# Altium PCB LED Driver and Switch Breakout.PcbDoc
Units mil, origin at the board's own origin, x right, y up, seen from the top; angles counter-clockwise.
Board outline 3815 x 5480 mil, 2 copper layers (Top Layer, Bottom Layer); 115 components, 114 nets, 550 pads, 22 vias.
Unrouted connection lines stored in the file: 68.
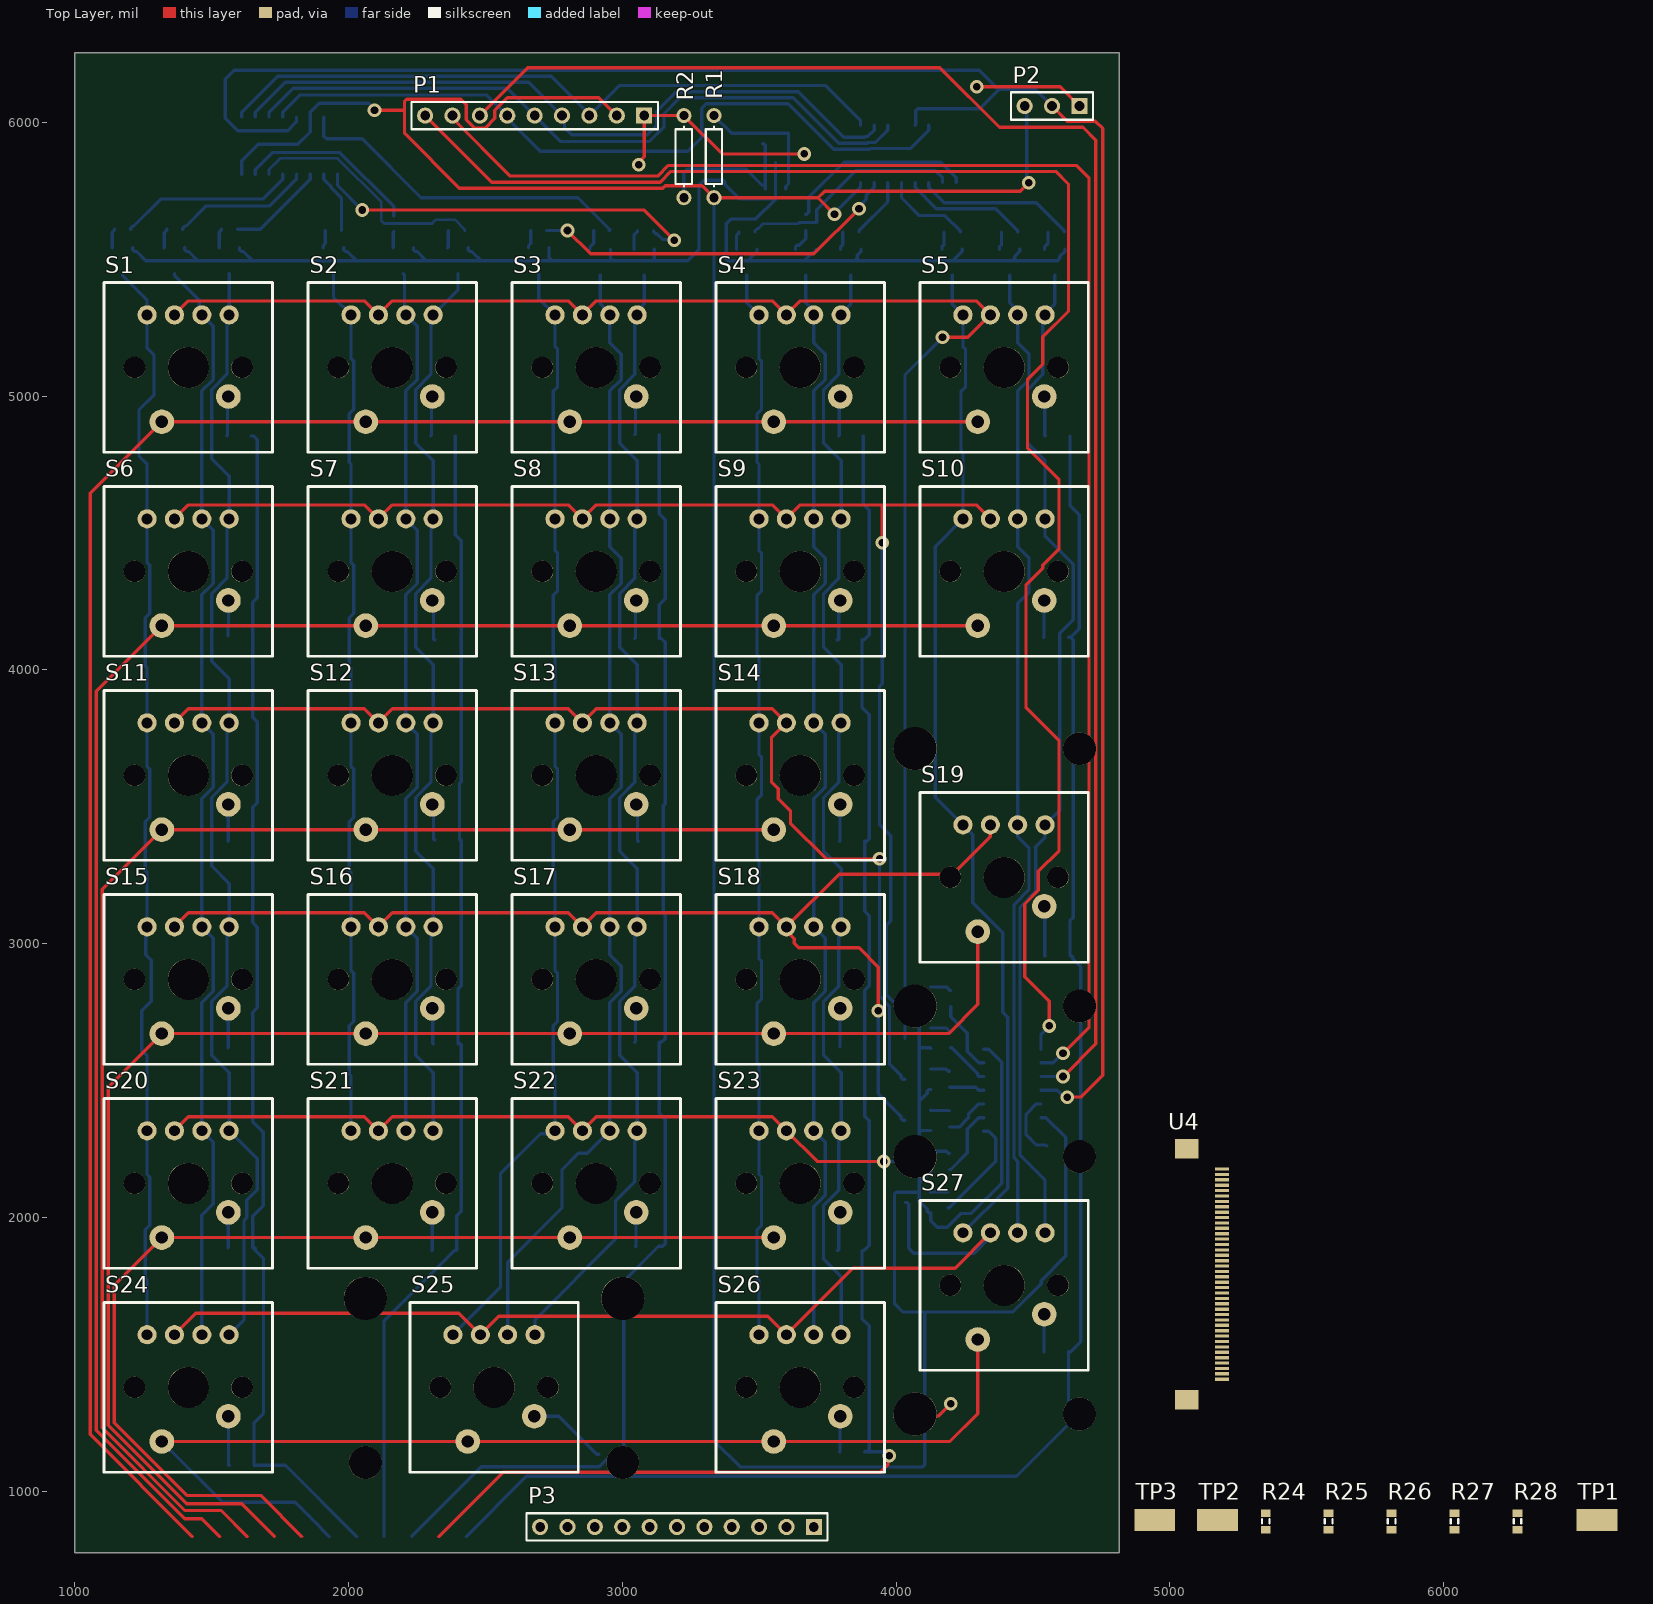
[diagram p0: Top Layer view]
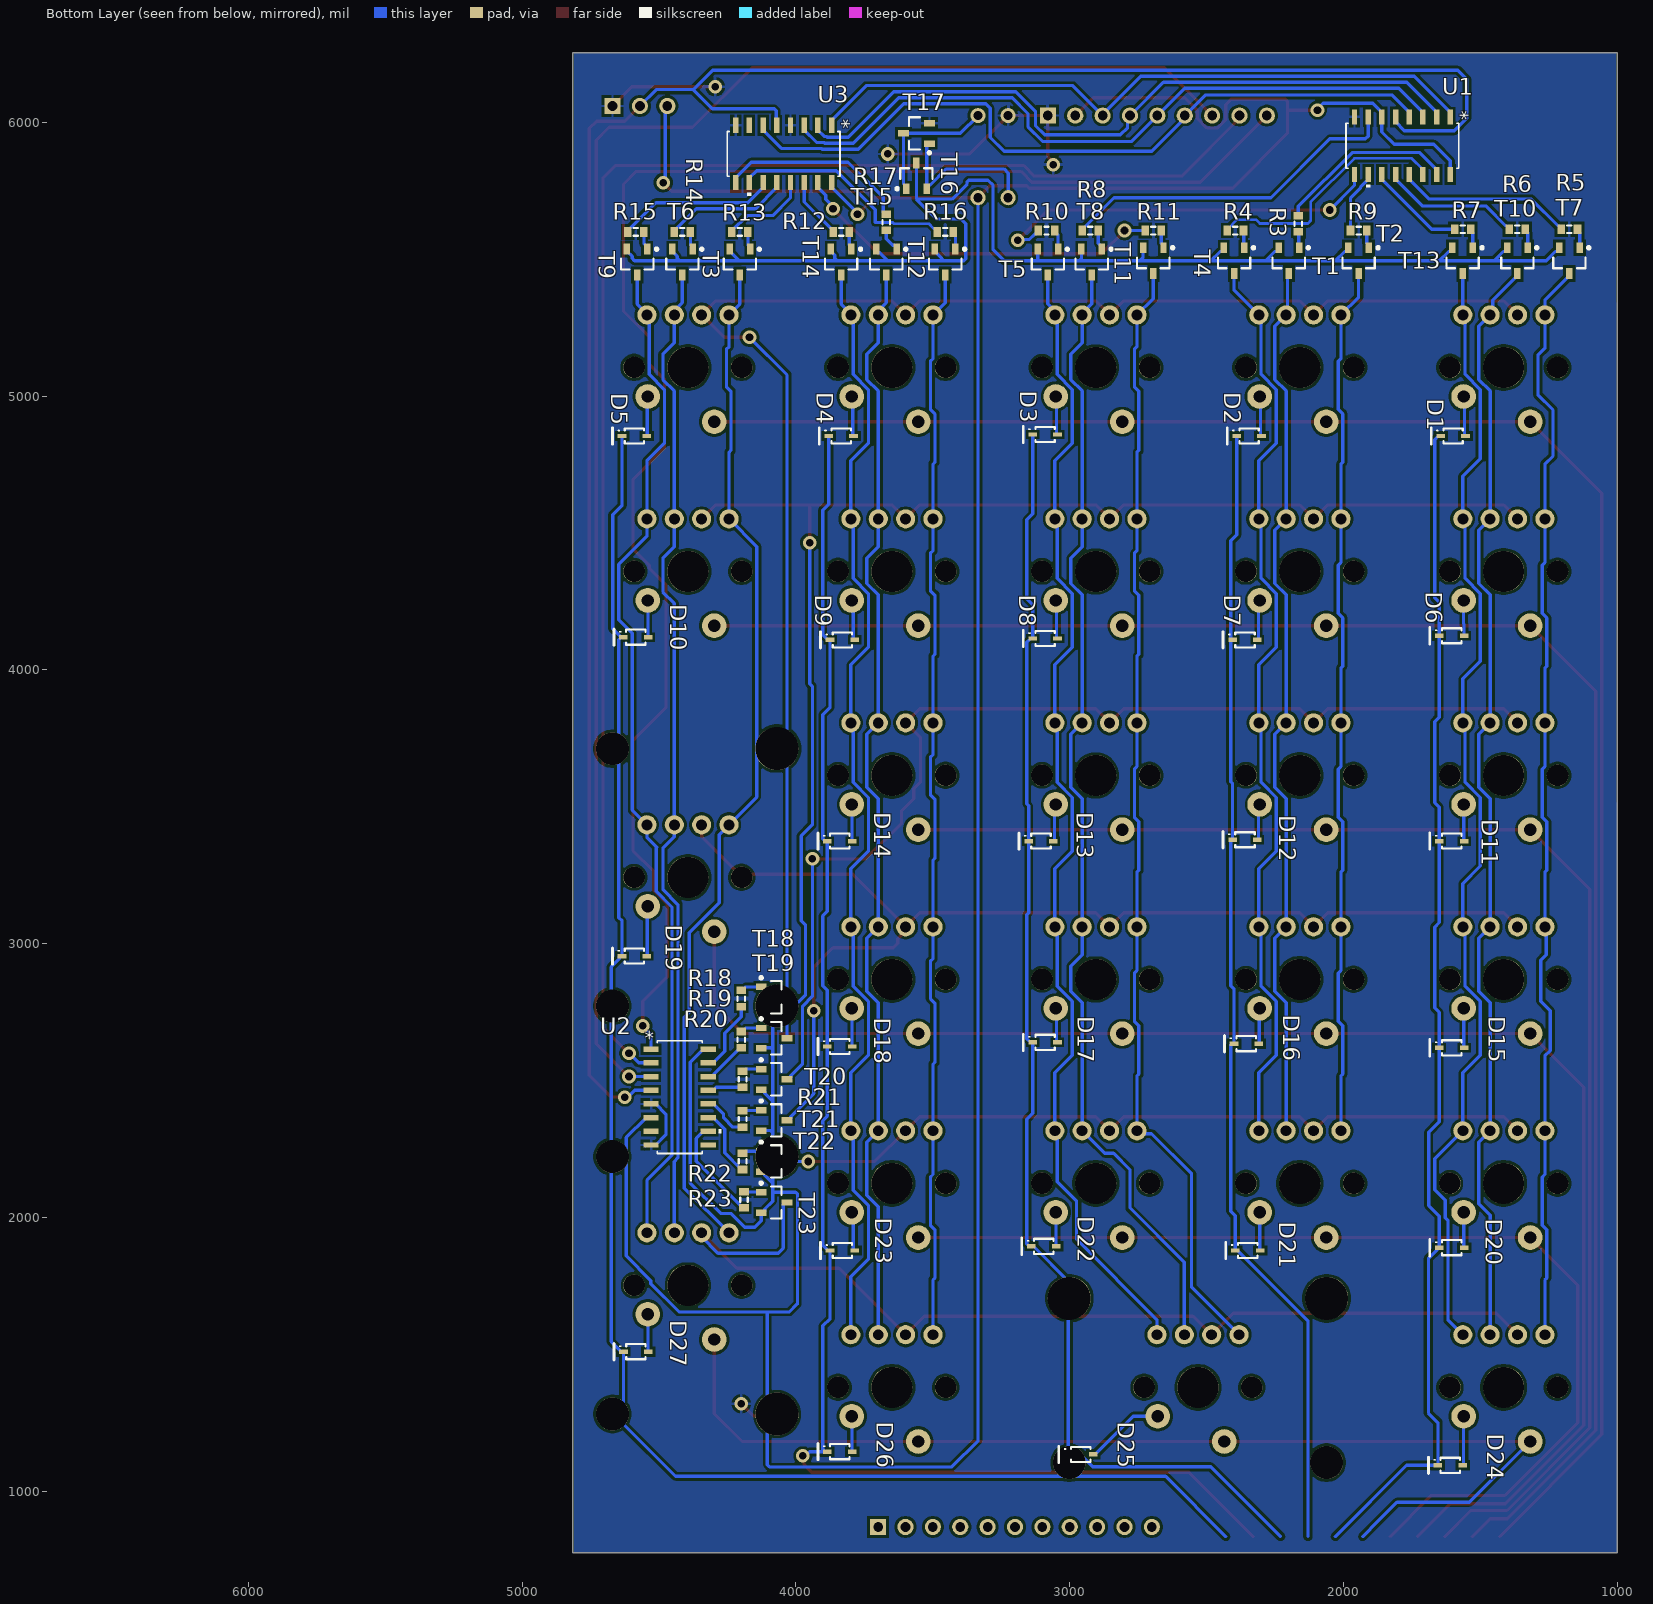
[diagram p1: Bottom Layer view, seen from below]
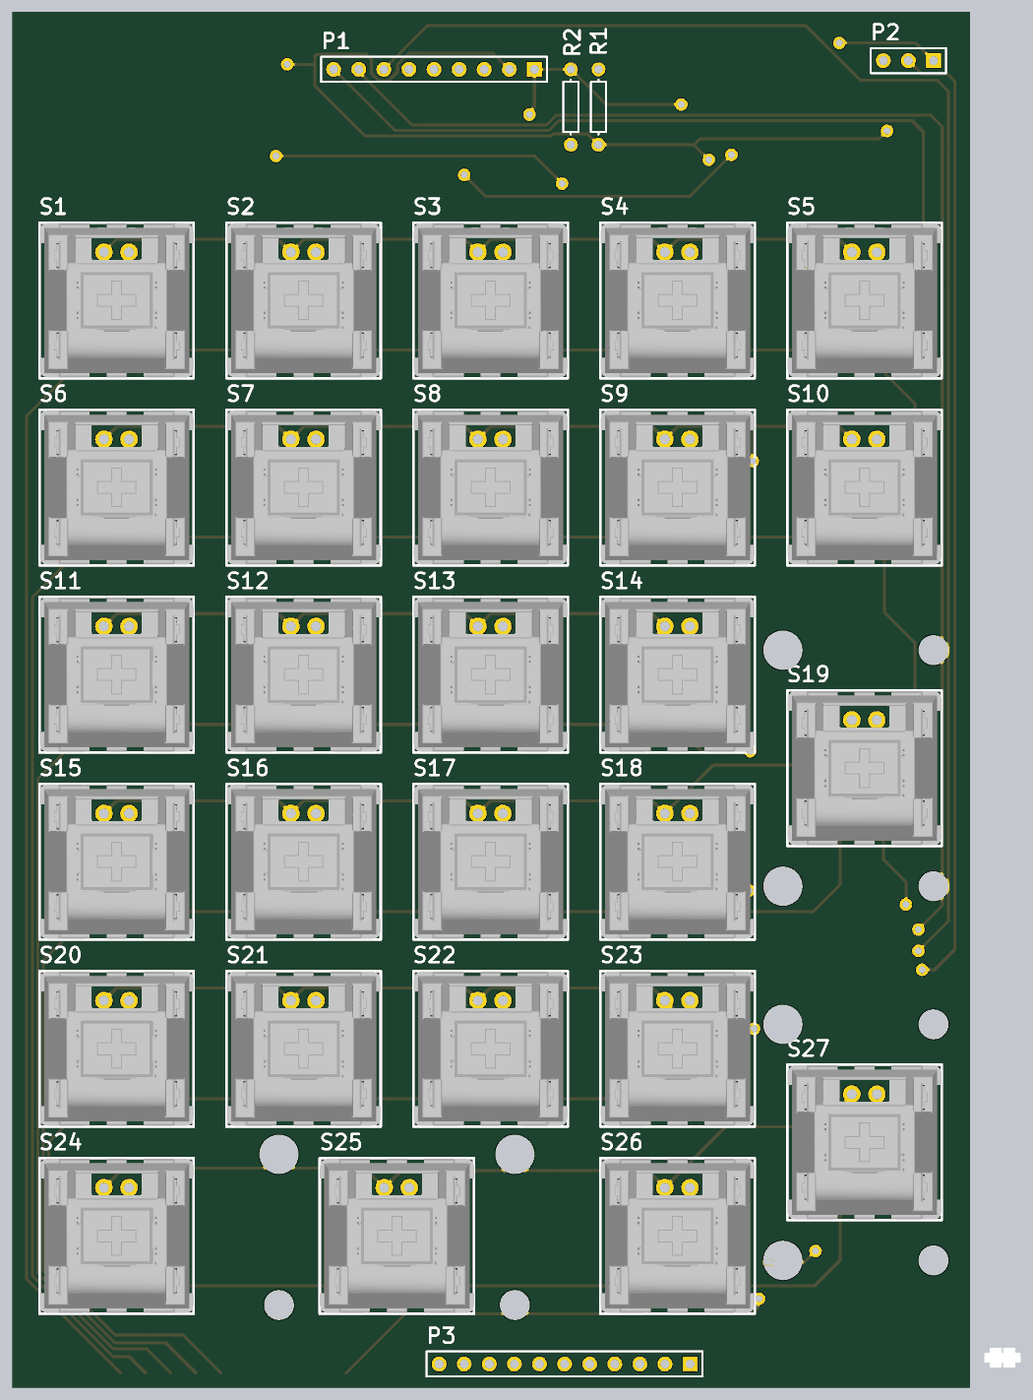
[diagram p2: 3D render of the assembled board from above, using the file's embedded part models]

## Layer stack, top to bottom
Top Solder: solder mask 0.4, Solder Resist, Dk 3.5
Top Layer: signal copper 1.4
Dielectric 1: dielectric 12.6, FR-4, Dk 4.8
Bottom Layer: signal copper 1.4
Bottom Solder: solder mask 0.4, Solder Resist, Dk 3.5

## Board outline
1000,775 4815,775 4815,6255 1000,6255

## Design rules (kind name [scope] priority, off if disabled: settings)
Clearance [All] p1: gap=10 ignorepadtopadclearanceinfootprint=FALSE except(0: Arc-Hole Track-Hole SMDPad-Hole THPad-Hole Via-Hole Fill-Hole Poly-Hole Region-Hole Text-Hole)
PolygonConnect [All] p1: connectstyle=Relief reliefconductorwidth=10 reliefentries=4 polygonreliefangle="90 Angle" airgapwidth=10
RoutingVias [All] p1: holewidth=28 width=50 viastyle="Through Hole" minholewidth=28 minwidth=50 maxholewidth=28 maxwidth=50
SolderMaskExpansion [All] p1: expansion=4 istentingtop=FALSE
Width [All] p1: maxlimit=30 minlimit=6 preferedwidth=12 bottomlayer_minwidth=10 minimp=50.000000 maximp=50.000000 favimp=50.000000
30 further rules are at their usual default settings.

## Classes and differential pairs
net class ALS[3..0]: ALS0 ALS1 ALS2 ALS3
net class AHS[2..0]: AHS0 AHS1 AHS2
net class SWL[4..0]: SWL0 SWL1 SWL2 SWL3 SWL4
net class SWH[5..0]: SWH0 SWH1 SWH2 SWH3 SWH4 SWH5
net class LS[14..0]: LS0 LS1 LS2 LS3 LS4 LS5 LS6 LS7 LS8 LS9 LS10 LS11 LS12 LS13 LS14
net class "LED Ca[14..0]": "LED Ca0" "LED Ca1" "LED Ca2" "LED Ca3" "LED Ca4" "LED Ca5" "LED Ca6" "LED Ca7" "LED Ca8" "LED Ca9" "LED Ca10" "LED Ca11" "LED Ca12" "LED Ca13" "LED Ca14"
net class "LED An[5..0]": "LED An0" "LED An1" "LED An2" "LED An3" "LED An4" "LED An5"
net class HS[5..0]: HS0 HS1 HS2 HS3 HS4 HS5
component class "LED Driver and Switch Breakout": P1 P2 P3 U4

## Components (designator, comment, footprint, x,y, rotation, side; value= is the part's Value field where it differs from the comment)
D1 "C2128 Diode" "C2128 SOD323" 1600,4855 r180 bottom
D2 "C2128 Diode" "C2128 SOD323" 2345,4855 r180 bottom
D3 "C2128 Diode" "C2128 SOD323" 3090,4860 r180 bottom
D4 "C2128 Diode" "C2128 SOD323" 3835,4855 r180 bottom
D5 "C2128 Diode" "C2128 SOD323" 4590,4855 r180 bottom
D6 "C2128 Diode" "C2128 SOD323" 1605,4125 r180 bottom
D7 "C2128 Diode" "C2128 SOD323" 2360,4110 r180 bottom
D8 "C2128 Diode" "C2128 SOD323" 3090,4115 r180 bottom
D9 "C2128 Diode" "C2128 SOD323" 3830.28,4110 r180 bottom
D10 "C2128 Diode" "C2128 SOD323" 4585,4120 r180 bottom
D11 "C2128 Diode" "C2128 SOD323" 1605,3375 r180 bottom
D12 "C2128 Diode" "C2128 SOD323" 2360,3380 r180 bottom
D13 "C2128 Diode" "C2128 SOD323" 3105,3375 r180 bottom
D14 "C2128 Diode" "C2128 SOD323" 3840,3375 r180 bottom
D15 "C2128 Diode" "C2128 SOD323" 1605,2620 r180 bottom
D16 "C2128 Diode" "C2128 SOD323" 2355,2635 r180 bottom
D17 "C2128 Diode" "C2128 SOD323" 3090.28,2640 r180 bottom
D18 "C2128 Diode" "C2128 SOD323" 3840,2625 r180 bottom
D19 "C2128 Diode" "C2128 SOD323" 4590,2955 r180 bottom
D20 "C2128 Diode" "C2128 SOD323" 1605,1890 r180 bottom
D21 "C2128 Diode" "C2128 SOD323" 2350,1880 r180 bottom
D22 "C2128 Diode" "C2128 SOD323" 3095,1895 r180 bottom
D23 "C2128 Diode" "C2128 SOD323" 3830.28,1880 r180 bottom
D24 "C2128 Diode" "C2128 SOD323" 1610,1095 r180 bottom
D25 "C2128 Diode" "C2128 SOD323" 2960,1135 r180 bottom
D26 "C2128 Diode" "C2128 SOD323" 3840,1145 r180 bottom
D27 "C2128 Diode" "C2128 SOD323" 4584.72,1510 r180 bottom
P1 "Header 9" HDR1X9 3080,6025 r180 top
P2 "Header 3" HDR1X3 4670,6060 r180 top
P3 "Header 11" HDR1X11 3700,870 r180 top
R1 "Res1" AXIAL-0.3 3335,5875 r270 top value=1K
R2 "Res1" AXIAL-0.3 3225,5875 r270 top value=1K
R3 "Res3" J1-0603 2165,5630 r270 bottom value=1K
R4 "Res3" J1-0603 2395,5605 r180 bottom value=1K
R5 "Res3" J1-0603 1175,5610 r180 bottom value=1K
R6 "Res3" J1-0603 1365.47,5610 r180 bottom value=1K
R7 "Res3" J1-0603 1565,5610 r180 bottom value=1K
R8 "Res3" J1-0603 2925,5605 r0 bottom value=1K
R9 "Res3" J1-0603 1945,5605 r180 bottom value=1K
R10 "Res3" J1-0603 3085,5605 r180 bottom value=1K
R11 "Res3" J1-0603 2695,5605 r180 bottom value=1K
R12 "Res3" J1-0603 3835,5600 r180 bottom value=1K
R13 "Res3" J1-0603 4205,5600 r180 bottom value=1K
R14 "Res3" J1-0603 4415,5600 r180 bottom value=1K
R15 "Res3" J1-0603 4585,5600 r180 bottom value=1K
R16 "Res3" J1-0603 3455,5600 r180 bottom value=1K
R17 "Res3" J1-0603 3670,5635 r270 bottom value=1K
R18 "Res3" J1-0603 4200,2800 r90 bottom value=1K
R19 "Res3" J1-0603 4200,2650 r90 bottom value=1K
R20 "Res3" J1-0603 4195,2505 r90 bottom value=1K
R21 "Res3" J1-0603 4195,2360 r90 bottom value=1K
R22 "Res3" J1-0603 4195,2205 r90 bottom value=1K
R23 "Res3" J1-0603 4190,2065 r90 bottom value=1K
R24 "Res3" J1-0603 5350,890 r90 top value=1K
R25 "Res3" J1-0603 5580,890 r90 top value=1K
R26 "Res3" J1-0603 5810,890 r90 top value=1K
R27 "Res3" J1-0603 6040,890 r90 top value=1K
R28 "Res3" J1-0603 6270,890 r90 top value=1K
S1 "Gateron w/ RGB LED" "GATERON GREEN" 1415,5105 r0 top
S2 "Gateron w/ RGB LED" "GATERON GREEN" 2160,5105 r0 top
S3 "Gateron w/ RGB LED" "GATERON GREEN" 2905,5105 r0 top
S4 "Gateron w/ RGB LED" "GATERON GREEN" 3650,5105 r0 top
S5 "Gateron w/ RGB LED" "GATERON GREEN" 4395,5105 r0 top
S6 "Gateron w/ RGB LED" "GATERON GREEN" 1415,4360 r0 top
S7 "Gateron w/ RGB LED" "GATERON GREEN" 2160,4360 r0 top
S8 "Gateron w/ RGB LED" "GATERON GREEN" 2905,4360 r0 top
S9 "Gateron w/ RGB LED" "GATERON GREEN" 3650,4360 r0 top
S10 "Gateron w/ RGB LED" "GATERON GREEN" 4395,4360 r0 top
S11 "Gateron w/ RGB LED" "GATERON GREEN" 1415,3615 r0 top
S12 "Gateron w/ RGB LED" "GATERON GREEN" 2160,3615 r0 top
S13 "Gateron w/ RGB LED" "GATERON GREEN" 2905,3615 r0 top
S14 "Gateron w/ RGB LED" "GATERON GREEN" 3650,3615 r0 top
S15 "Gateron w/ RGB LED" "GATERON GREEN" 1415,2870 r0 top
S16 "Gateron w/ RGB LED" "GATERON GREEN" 2160,2870 r0 top
S17 "Gateron w/ RGB LED" "GATERON GREEN" 2905,2870 r0 top
S18 "Gateron w/ RGB LED" "GATERON GREEN" 3650,2870 r0 top
S19 "Gateron w/ RGB LED" "GATERON GREEN W/ STABILIZER VERTICAL" 4395,3242.5 r0 top
S20 "Gateron w/ RGB LED" "GATERON GREEN" 1415,2125 r0 top
S21 "Gateron w/ RGB LED" "GATERON GREEN" 2160,2125 r0 top
S22 "Gateron w/ RGB LED" "GATERON GREEN" 2905,2125 r0 top
S23 "Gateron w/ RGB LED" "GATERON GREEN" 3650,2125 r0 top
S24 "Gateron w/ RGB LED" "GATERON GREEN" 1415,1380 r0 top
S25 "Gateron w/ RGB LED" "GATERON GREEN W/ STABILIZER HORIZONTAL" 2532,1380 r0 top
S26 "Gateron w/ RGB LED" "GATERON GREEN" 3650,1380 r0 top
S27 "Gateron w/ RGB LED" "GATERON GREEN W/ STABILIZER VERTICAL" 4395,1752.5 r0 top
T1 "C344010 NCH MOS" "C6749 NPN BJT" 2200,5495 r270 bottom
T2 "C344010 NCH MOS" "C6749 NPN BJT" 1945,5495 r270 bottom
T3 "C344010 NCH MOS" "C6749 NPN BJT" 4205,5490 r270 bottom
T4 "C344010 NCH MOS" "C6749 NPN BJT" 2400,5495 r270 bottom
T5 "C344010 NCH MOS" "C6749 NPN BJT" 3080,5490 r270 bottom
T6 "C344010 NCH MOS" "C6749 NPN BJT" 4415,5490 r270 bottom
T7 "C344010 NCH MOS" "C6749 NPN BJT" 1175,5495 r270 bottom
T8 "C344010 NCH MOS" "C6749 NPN BJT" 2920,5490 r270 bottom
T9 "C344010 NCH MOS" "C6749 NPN BJT" 4580,5490 r270 bottom
T10 "C344010 NCH MOS" "C6749 NPN BJT" 1365,5495 r270 bottom
T11 "C344010 NCH MOS" "C6749 NPN BJT" 2695,5495 r270 bottom
T12 "C344010 NCH MOS" "C6749 NPN BJT" 3455,5490 r270 bottom
T13 "C344010 NCH MOS" "C6749 NPN BJT" 1565,5495 r270 bottom
T14 "C344010 NCH MOS" "C6749 NPN BJT" 3835,5490 r270 bottom
T15 "C344010 NCH MOS" "C6749 NPN BJT" 3670,5490 r270 bottom
T16 "C6749 NPN BJT" "C6749 NPN BJT" 3560,5805 r90 bottom
T17 "C6749 NPN BJT" "C6749 NPN BJT" 3560,5960 r0 bottom
T18 "C15127 PCH MOS" "C6749 NPN BJT" 4080,2805 r180 bottom
T19 "C15127 PCH MOS" "C6749 NPN BJT" 4080,2655 r180 bottom
T20 "C15127 PCH MOS" "C6749 NPN BJT" 4080,2505 r180 bottom
T21 "C15127 PCH MOS" "C6749 NPN BJT" 4080,2355 r180 bottom
T22 "C15127 PCH MOS" "C6749 NPN BJT" 4080,2205 r180 bottom
T23 "C15127 PCH MOS" "C6749 NPN BJT" 4080,2055 r180 bottom
TP1 "5019" KSTN-5019_V 6560,895 r0 top
TP2 "5019" KSTN-5019_V 5175,895 r0 top
TP3 "5019" KSTN-5019_V 4945,895 r0 top
U1 "74HC238" SOIC16 1785,5915 r270 bottom
U2 "74HC138" SOIC16 4425,2440 r180 bottom
U3 "74HC238" SOIC16 4045,5885 r270 bottom
U4 "FFC 40pos Connector" F305-1A7H1-11040-E100 5190,1409.45 r90 top

## Footprints (in the part's own frame and the unit in brackets; to place one, negate y for a bottom-side part, rotate by r counter-clockwise, add the part's x,y. Pads: shape width x height; smd on the part's side, far side on the other; paste and mask are expansions set on the pad)
AXIAL-0.3 [mm] "Axial Device, Thru-Hole; 2 Leads; 0.3 in Pin Spacing"
  round 1.4 hole 0.85: 1(-3.81,0) 2(3.81,0)
  silkscreen extent -2.77,-0.76 2.77,0.76
"C2128 SOD323" [mm] "SODFL, 2-Leads, Body 1.30x2.50mm, IPC Medium Density"
  rect 0.8x0.4 smd: 1(1.15,0) 2(-1.15,0)
  silkscreen extent -2.03,-0.76 0.9,0.76, body extent -0.9,-0.7 0.9,0.7, height 1.1
"C6749 NPN BJT" [mm] "SOT23, 3-Leads, Body 2.90x2.45mm, Pitch 0.95mm, IPC Medium Density"
  rect 1x0.6 smd: 1(-1.2,0.95) 2(-1.2,-0.95) 3(1.2,0)
  silkscreen extent -1.32,-1.5 0.7,1.92, body extent -0.7,-1.5 0.7,1.5, height 1.1
F305-1A7H1-11040-E100 [mm] "40 pos FFC"
  rect 0.3x1.3 smd: 1(0,0) 2(0.5,0) 3(1,0) 4(1.5,0) 5(2,0) 6(2.5,0) 7(3,0) 8(3.5,0) 9(4,0) 10(4.5,0) 11(5,0) 12(5.5,0) 13(6,0) 14(6.5,0) 15(7,0) 16(7.5,0) 17(8,0) 18(8.5,0) 19(9,0) 20(9.5,0) 21(10,0) 22(10.5,0) 23(11,0) 24(11.5,0) 25(12,0) 26(12.5,0) 27(13,0) 28(13.5,0) 29(14,0) 30(14.5,0) 31(15,0) 32(15.5,0) 33(16,0) 34(16.5,0) 35(17,0) 36(17.5,0) 37(18,0) 38(18.5,0) 39(19,0) 40(19.5,0)
  rect 1.8x2.2 smd: NC(-1.9,3.25) NC(21.4,3.25)
  body extent -2.37,-0.49 21.93,5.21, height 1.95
"GATERON GREEN" [mil]
  round 70 hole 40: 1(-150.51,192.01) 2(-50.51,192.01) 3(49.49,192.01) 4(149.5,192)
  round 90 hole 45: 5(-96.5,-198) 6(146.5,-105.99)
  round 78.74 hole 78.74: ""(-196.5,0) ""(196.5,0)
  round 150 hole 150: ""(0,0)
  silkscreen extent -308,-310 308,310, body extent -307,-307 307,307, height 608
"GATERON GREEN W/ STABILIZER HORIZONTAL" [mil] "1x2 cherry screw in stabilizer"
  round 70 hole 40: 1(-150.51,192.01) 2(-50.51,192.01) 3(49.49,192.01) 4(149.5,192)
  round 90 hole 45: 5(-96.5,-198) 6(146.5,-105.99)
  round 120 hole 120 unplated: 10(-470,-275) 10(470,-275)
  round 157.01 hole 157 unplated: 10(-470,325) 10(470,325)
  round 78.74 hole 78.74: ""(-196.5,0) ""(196.5,0)
  round 150 hole 150: ""(0,0)
  silkscreen extent -308,-310 308,310, body extent -307,-307 307,307, height 608
"GATERON GREEN W/ STABILIZER VERTICAL" [mil] "1x2 cherry screw in stabilizer"
  round 70 hole 40: 1(-150.51,192.01) 2(-50.51,192.01) 3(49.49,192.01) 4(149.5,192)
  round 90 hole 45: 5(-96.5,-198) 6(146.5,-105.99)
  round 157.01 hole 157 unplated: 10(-325,-470) 10(-325,470)
  round 120 hole 120 unplated: 10(275,-470) 10(275,470)
  round 78.74 hole 78.74: ""(-196.5,0) ""(196.5,0)
  round 150 hole 150: ""(0,0)
  silkscreen extent -308,-310 308,310, body extent -307,-307 307,307, height 608
HDR1X3 [mm] "Connector; Header; 3 Position"
  rect 1.5x1.5 hole 0.9: 1(0,0)
  round 1.5 hole 0.9: 2(2.54,0) 3(5.08,0)
  silkscreen extent -1.27,-1.27 6.35,1.27
HDR1X9 [mm] "Connector; Header; 9 Position"
  rect 1.5x1.5 hole 0.9: 1(0,0)
  round 1.5 hole 0.9: 2(2.54,0) 3(5.08,0) 4(7.62,0) 5(10.16,0) 6(12.7,0) 7(15.24,0) 8(17.78,0) 9(20.32,0)
  silkscreen extent -1.27,-1.27 21.59,1.27
HDR1X11 [mm] "Connector; Header; 11 Position"
  rect 1.5x1.5 hole 0.9: 1(0,0)
  round 1.5 hole 0.9: 2(2.54,0) 3(5.08,0) 4(7.62,0) 5(10.16,0) 6(12.7,0) 7(15.24,0) 8(17.78,0) 9(20.32,0) 10(22.86,0) 11(25.4,0)
  silkscreen extent -1.27,-1.27 26.67,1.27
J1-0603 [mm] "Chip Resistor, Body 1.6x0.8mm, IPC High Density"
  rect 0.7x0.9 smd: 1(-0.75,0) 2(0.75,0)
  silkscreen extent -0.2,-0.35 0.2,0.35, body extent -0.85,-0.48 0.85,0.48, height 0.9
KSTN-5019_V [mm] "Test Point, 1-Leads, Body 3.81x2.03mm"
  rect 3.8x2.03 smd: 1(0,0)
  body extent -1.9,-1.01 1.9,1.02, height 2.29
SOIC16 [mil]
  rect 55.5x20 smd paste+0 mask+0: 1(-104.75,175) 2(-104.75,125) 3(-104.75,75) 4(-104.75,25) 5(-104.75,-25) 6(-104.75,-75) 7(-104.75,-125) 8(-104.75,-175) 9(104.75,-175) 10(104.75,-125) 11(104.75,-75) 12(104.75,-25) 13(104.75,25) 14(104.75,75) 15(104.75,125) 16(104.75,175)
  silkscreen extent -82,-206 152,206, body extent -118,-201 118,201, height 61

## Part data
P1: "Header, 9-Pin", LatestRevisionDate=17-Jul-2002, LatestRevisionNote="Re-released for DXP Platform.", Publisher="Altium Limited"
P2: "Header, 3-Pin", LatestRevisionDate=17-Jul-2002, LatestRevisionNote="Re-released for DXP Platform.", Publisher="Altium Limited"
P3: "Header, 11-Pin", LatestRevisionDate=17-Jul-2002, LatestRevisionNote="Re-released for DXP Platform.", Publisher="Altium Limited"
R1 R2 R3 R4 R5 R6 R7 R8 R9 R10 R11 R12 R13 R14 R15 R16 R17 R18 R19 R20 R21 R22 R23 R24 R25 R26 R27 R28: "Resistor", Published=8-Jun-2000, Publisher="Altium Limited"
  R1 R2: LatestRevisionDate=17-Jul-2002, LatestRevisionNote="Re-released for DXP Platform.", PackageDescription="Axial Device, Thru-Hole; 2 Leads; 0.3 in Pin Spacing", PackageReference=AXIAL-0.3
  R3 R4 R5 R6 R7 R8 R9 R10 R11 R12 R13 R14 R15 R16 R17 R18 R19 R20 R21 R22 R23 R24 R25 R26 R27 R28: LatestRevisionDate=29-May-2009, LatestRevisionNote="IPC-7351 Footprint Added.", PackageDescription="Chip Resistor", PackageReference=J1-0603
S1 S2 S3 S4 S5 S6 S7 S8 S9 S10 S11 S12 S13 S14 S15 S16 S17 S18 S19 S20 S21 S22 S23 S24 S25 S26 S27: library part "Gateron Green"
TP1 TP2 TP3: library part CMP-1672-00008-1, "Test Point, 1 Position SMD, RoHS, Tape and Reel", Package Quantity=1000, ComponentLink1Description="Manufacturer URL", ComponentLink1URL=http://www.keyelco.com/, ComponentLink2Description=Datasheet, ComponentLink2URL=http://www.keyelco.com/product-pdf.cfm?p=1357, Contact Plating=Silver, DatasheetVersion=03/2014, Mount="Surface Mount", Mounting Technology="Surface Mount", PackageDescription="1-Pin Surface Mount Device, Body 3.81 x 2.03 mm", PackageReference=5019, Packaging="Tape and Reel", Pins=1, RoHSCompliant=True

## Via types
v1: diameter 50, hole 28, Top Layer to Bottom Layer, 22 vias

## Nets (pads, with @x,y where several pads share a name; then routed paths per layer and width w, separated by ;. In a path a pad name is that pad's centre, name@x,y a point inside that pad or via, vN(x,y) a via of type N, cw(c..) or ccw(c..) an arc to the next point about the centre after c; other vN are vias at no path point)
+5: P1.2 P2.3 R1.2 T18.2 T19.2 T20.2 T21.2 T22.2 T23.2 TP3.1 U1.6 U1.16 U2.6 U2.16 U3.16 U4.39 U4.40 | length 14374.4
  Top Layer w12: v1(2095,6045) 2205,6045 ; P1.2 2915,6090 2580.61,6090 2534.47,6043.86 2534.47,6015.09 2498.86,5979.47 2461.14,5979.47 2430,6010.61 2430,6065 2410,6085 2212.03,6085 2205,6077.97 2205,6045 ; v1(3775,5665) 3715,5725 ; v1(4485,5780) 4453.86,5748.86 3738.86,5748.86 3715,5725 ; 2205,6045 2205,5960 2405,5760 3148,5760 3156.56,5768.56 3291.44,5768.56 R1.2 3715,5725
  Bottom Layer w12: U1.16 1610,5860 1670,5920 1815,5920 1860,5965 U1.6 1860,6037.5 1892.5,6070 2075,6070 2095,6050 v1(2095,6045) ; R1.2 3335,1185 3431,1089 4096.97,1089 4105,1097.03 4105,1655 ; v1(3775,5665) 3775,5667.5 3870,5762.5 U3.16 ; T22.2 4119.37,2167.6 4113.56,2161.79 4113.56,2153.91 4085,2125.35 ; T21.2 4092.03,2317.6 4085,2310.57 ; T20.2 4119.37,2467.6 4113.56,2461.79 4113.56,2453.91 4085,2425.35 ; T19.2 4124.84,2620 4092.03,2620 4085,2612.97 ; T18.2 4119.37,2767.6 4113.56,2761.79 4113.56,2753.91 4085,2725.35 4085,2612.97 ; U2.16 4338,2615 4386,2567 4386,2126 4275,2015 4237.53,2015 4187.5,1964.97 4150.03,1964.97 4127.24,1987.76 T23.2 4119.37,2017.6 4113.56,2023.41 4113.56,2031.28 4085,2059.84 4085,2092.6 ; P2.3 4477.73,6052.27 4477.73,5787.27 v1(4485,5780) ; U2.6 4547.5,2365 4620,2292.5 4620,1860 4530,1770 4530,1758.31 4426.69,1655 4105,1655 ; 4085,2092.6 4085,2125.35 ; 4085,2092.6 4001.4,2092.6 3994.37,2085.57 3994.37,1685.63 3995,1685 4025,1655 4105,1655 ; 4085,2125.35 4085,2310.57 ; 4085,2310.57 4085,2425.35 ; 4085,2425.35 4085,2612.97
AHS0: P1.9 U2.1 U4.21 | length 5957
  Top Layer w12: P1.9 2523,5782 3138.89,5782 3177.89,5821 4583.97,5821 4630,5774.97 4630,5310.38 4536.13,5216.51 4536.13,5117.44 4480.5,5061.8 4480.5,4809.55 4595.5,4694.55 4595.5,4442.3 4536.13,4382.94 4536.13,4372.44 4475,4311.31 4475,3862.05 4595.5,3741.55 4595.5,3340.5 4520,3265 4520,3195.31 4470,3145.31 4470,2880 4560,2790 v1(4560,2700)
  Bottom Layer w12: U2.1 4529.75,2669.44 4560,2699.69 v1(4560,2700)
AHS1: P1.8 U2.2 U4.23
AHS2: P1.7 U2.3 U4.25
ALS0: P1.6 U1.1 U3.1 U4.27
ALS1: P1.5 U1.2 U3.2 U4.29
ALS2: P1.4 U1.3 U3.3 U4.31
ALS3: P1.3 U1.4 U3.6 U4.33
En: P2.2 TP1.1 U1.5 U2.4 U3.5 U4.1 | length 7874.9
  Top Layer w12: P2.2 4625.52,6004.48 4728.49,6004.48 4755,5977.97 4755,2520 4675,2440 v1(4625,2440)
  Bottom Layer w12: U1.5 1810,6002 1778,5970 1595,5970 1550,6015 1550,6157.97 1583.03,6191 4304,6191 4375,6120 ; U3.5 4072.49,5992.24 4072.49,6042.97 4079.51,6050 4305,6050 4375,6120 ; U2.4 4589.72,2465 4614.72,2440 v1(4625,2440) ; P2.2 4510,6120 4375,6120
GND: P1.1 P2.1 R2.1 R24.2 R25.2 R26.2 R27.2 R28.2 T17.2 U1.8 U2.5 U2.8 U3.4 U3.8 U4.35 U4.36 U4.37 | length 1678.5
  Top Layer w12: v1(3060,5845) 3060,5855.28 3080,5875.28 P1.1 R2.1 3365,5885 v1(3665,5885) ; v1(4015,1275) 4155,1275 v1(4200,1320) ; v1(4295,6130) 4600,6130 P2.1
  Bottom Layer w12: U2.5 4512,2415 4475,2378 4475,2302 4512,2265 U2.8 4547.5,2265 U2.8@4551.5,2261
HS0: R18.2 T18.1 | length 78.1
  Bottom Layer w12: T18.1 4183.19,2842.4 4196.06,2829.53 R18.2
HS1: R19.2 T19.1 | length 78.1
  Bottom Layer w12: T19.1 4183.19,2692.4 4196.06,2679.53 R19.2
HS2: R20.2 T20.1 | length 71
  Bottom Layer w12: T20.1 4183.19,2542.4 4191.06,2534.53 R20.2
HS3: R21.2 T21.1 | length 68.9
  Bottom Layer w12: T21.1 4128.68,2390.96 4193.56,2390.96 R21.2
HS4: R22.2 T22.1 | length 71
  Bottom Layer w12: T22.1 4183.19,2242.4 4191.06,2234.53 R22.2
HS5: R23.2 T23.1 | length 63.6
  Bottom Layer w12: T23.1 4128.31,2093.46 4188.94,2093.46 R23.2
"LED An0": S1.2 S2.2 S3.2 S4.2 S5.2 T18.3 | length 5824.3
  Top Layer w12: S1.2 1415.49,5348.01 2058.49,5348.01 S2.2 2160.49,5348.01 2803.49,5348.01 S3.2 2905.49,5348.01 3548.49,5348.01 S4.2 3650.49,5348.01 4293.49,5348.01 S5.2 4262.48,5215 v1(4170,5215)
  Bottom Layer w12: T18.3 4032.76,5077.76 v1(4170,5215)
"LED An1": S6.2 S7.2 S8.2 S9.2 S10.2 T19.3 | length 5152.8
  Top Layer w12: S6.2 1415.49,4603.01 2058.49,4603.01 S7.2 2160.49,4603.01 2803.49,4603.01 S8.2 2905.49,4603.01 3548.49,4603.01 S9.2 3650.49,4603.01 3950,4603.01 ; v1(3950,4465) 3950,4603.01 ; S10.2 4293.49,4603.01 3950,4603.01
  Bottom Layer w12: v1(3950,4465) 3950,3949.89 3939.97,3939.86 3939.97,3435.03 3981,3394 3981,3083.99 3965,3067.99 3965,2814.1 4032.76,2746.34 T19.3
"LED An2": S11.2 S12.2 S13.2 S14.2 T20.3 | length 4007.2
  Top Layer w12: S11.2 1415.49,3858.01 2058.49,3858.01 S12.2 2160.49,3858.01 2803.49,3858.01 S13.2 2905.49,3858.01 3548.49,3858.01 S14.2 3545,3752.52 3545,3591.31 3570,3566.31 3570,3530 3614.5,3485.5 3614.5,3440.5 3745,3310 v1(3940,3310)
  Bottom Layer w12: v1(3940,3310) 3940,2807.98 3976,2771.98 3976,2561.76 4019.07,2518.69 4019.07,2510.81 4024.88,2505 T20.3
"LED An3": S15.2 S16.2 S17.2 S18.2 S19.2 T21.3 | length 4306.5
  Top Layer w12: S15.2 1415.49,3113.01 2058.49,3113.01 S16.2 2160.49,3113.01 2803.49,3113.01 S17.2 2905.49,3113.01 3548.49,3113.01 S18.2 ; v1(3935,2755) 3935,2915 3865,2985 3645,2985 3627.79,3002.21 3627.79,3018.01 3599.49,3046.31 S18.2 ; S19.2 4344.49,3391.01 4207.85,3254.37 3791.85,3254.37 S18.2
  Bottom Layer w12: v1(3935,2755) 3935,2452.76 4019.07,2368.69 4019.07,2360.81 4024.88,2355 T21.3
"LED An4": S20.2 S21.2 S22.2 S23.2 T22.3 | length 2841.4
  Top Layer w12: S20.2 1415.49,2368.01 2058.49,2368.01 S21.2 2160.49,2368.01 2803.49,2368.01 S22.2 2905.49,2368.01 3548.49,2368.01 S23.2 3711.5,2205 v1(3955,2205)
  Bottom Layer w12: v1(3955,2205) T22.3
"LED An5": S24.2 S25.2 S26.2 S27.2 T23.3 | length 3776.6
  Top Layer w12: S24.2 1442.48,1650 2403.5,1650 S25.2 2549.48,1640 3531.5,1640 S26.2 3842.48,1815 4215.48,1815 S27.2@4344.49,1944.01
  Bottom Layer w12: T23.3 4040.63,2055 4046.44,2049.19 4046.44,1888.56 4065,1870 4285,1870 4344.49,1929.49 S27.2@4344.49,1944.01
"LED Ca0": S1.4 S6.4 S11.4 S15.4 S20.4 S24.4 T13.3 | length 4172.9
  Bottom Layer w12: S24.4 1618.53,1626.03 1618.53,1989.77 1628.28,1999.52 1628.28,2063.47 1666.87,2102.07 1666.87,2214.63 S20.4 1564.5,2528.98 1500.5,2592.98 1500.5,2789.27 1556.13,2844.91 1556.13,3053.63 S15.4 1564.5,3220.11 1500.5,3284.11 1500.5,3534.27 1556.13,3589.91 1556.13,3798.63 S11.4 1564.5,3967.61 1500.5,4031.61 1500.5,4279.27 1556.13,4334.91 1556.13,4543.63 S6.4 1564.5,4707.61 1500.5,4771.61 1500.5,5024.27 1556.13,5079.91 1556.13,5288.63 S1.4 1564.75,5297.25 1564.75,5447.5 T13.3
"LED Ca1": S1.3 S6.3 S11.3 S15.3 S20.3 S24.3 T10.3 | length 4088.9
  Bottom Layer w12: T10.3 1365,5439.88 1454.87,5350.01 1454.87,5306.62 S1.3 1506,5255.5 1506,5060.89 1464.49,5019.38 S6.3 1506,4510.5 1506,4315.89 1464.49,4274.38 S11.3 1506,3765.5 1506,3570.89 1464.49,3529.38 S15.3 1506,3020.5 1506,2825.89 1464.49,2784.38 S20.3 1506,2275.5 1506,2049.78 1464.49,2008.27 S24.3
"LED Ca2": S1.1 S6.1 S11.1 S15.1 S20.1 S24.1 T7.3 | length 4031.8
  Bottom Layer w12: T7.3 1175,5439.88 1264.49,5350.39 S1.1 1264.49,5175.51 1290,5150 1290,5005 1235,4950 1235,4781.53 1264.49,4752.04 S6.1 1264.49,4392.32 1273.87,4382.94 1273.87,4206.67 1257.5,4190.3 1257.5,4014.03 1264.49,4007.04 S11.1 1264.49,3647.32 1273.87,3637.93 1273.87,3461.67 1257.5,3445.3 1257.5,3269.03 1264.49,3262.04 S15.1 1260,3057.52 1260,2960 1280,2940 1280,2790 1245,2755 1245,2610 1264.49,2590.51 S20.1 1264.49,2157.32 1273.87,2147.93 1273.87,1971.67 1257.5,1955.3 1257.5,1779.03 1264.49,1772.04 S24.1
"LED Ca3": S2.4 S7.4 S12.4 S16.4 S21.4 T4.3 | length 3380.3
  Bottom Layer w12: S21.4 2309.5,2528.98 2245.5,2592.98 2245.5,2789.27 2301.13,2844.91 2301.13,3053.63 S16.4 2309.5,3273.98 2245.5,3337.98 2245.5,3534.27 2301.13,3589.91 2301.13,3798.63 S12.4 2309.5,4018.98 2245.5,4082.98 2245.5,4279.27 2301.13,4334.91 2301.13,4543.63 S7.4 2309.5,4763.98 2245.5,4827.98 2245.5,5024.27 2301.13,5079.91 2301.13,5288.63 S2.4 2400,5387.5 T4.3
"LED Ca4": S2.3 S7.3 S12.3 S16.3 S21.3 T1.3 | length 3272.2
  Bottom Layer w12: T1.3 2204.74,5443.01 2204.74,5301.75 S2.3 2251,5255.5 2251,5060.89 2209.49,5019.38 S7.3 2251,4510.5 2251,4315.89 2209.49,4274.38 S12.3 2251,3765.5 2251,3570.89 2209.49,3529.38 S16.3 2251,3020.5 2251,2825.89 2209.49,2784.38 S21.3
"LED Ca5": S2.1 S7.1 S12.1 S16.1 S21.1 T2.3 | length 3211.7
  Bottom Layer w12: T2.3 1945,5361.5 S2.1 2009.49,5137.32 2018.87,5127.94 2018.87,4951.67 2002.5,4935.3 2002.5,4759.03 2009.49,4752.04 S7.1 2009.49,4392.32 2018.87,4382.94 2018.87,4206.67 2002.5,4190.3 2002.5,4014.03 2009.49,4007.04 S12.1 2009.49,3647.32 2018.87,3637.93 2018.87,3461.67 2002.5,3445.3 2002.5,3269.03 2009.49,3262.04 S16.1 2009.49,2902.32 2018.87,2892.93 2018.87,2716.67 2002.5,2700.3 2002.5,2524.03 2009.49,2517.04 S21.1
"LED Ca6": S3.4 S8.4 S13.4 S17.4 S22.4 S25.4 T5.3 | length 4247.9
  Bottom Layer w12: S25.4 2681.5,1626.5 2975,1920 2975,2060 3046.13,2131.13 3046.13,2308.63 S22.4 3054.5,2528.98 2990.5,2592.98 2990.5,2789.27 3046.13,2844.91 3046.13,3053.63 S17.4 3054.5,3273.98 2990.5,3337.98 2990.5,3534.27 3046.13,3589.91 3046.13,3798.63 S13.4 3054.5,4018.98 2990.5,4082.98 2990.5,4279.27 3046.13,4334.91 3046.13,4543.63 S8.4 3054.5,4763.98 2990.5,4827.98 2990.5,5024.27 3046.13,5079.91 3046.13,5288.63 S3.4 3054.5,5312.69 3080,5338.2 T5.3
"LED Ca7": S3.3 S8.3 S13.3 S17.3 S22.3 S25.3 T8.3 | length 4196.1
  Bottom Layer w12: S25.3 2581.49,1836.49 2780,2035 2780,2175 2840,2235 2872.48,2235 S22.3 2954.49,2784.38 2996,2825.89 2996,2918.55 2954.49,2960.07 S17.3 2954.49,3529.38 2996,3570.89 2996,3765.5 S13.3 2954.49,4274.38 2996,4315.89 2996,4408.55 2954.49,4450.07 S8.3 2954.49,5019.38 2996,5060.89 2996,5153.55 2954.49,5195.07 S3.3 2954.49,5302.98 2920,5337.47 T8.3
"LED Ca8": S3.1 S8.1 S13.1 S17.1 S22.1 S25.1 T11.3 | length 4134
  Bottom Layer w12: S25.1 2555,1745.52 2555,2160 2701.49,2306.49 2743.97,2306.49 S22.1 2754.49,2517.04 2747.5,2524.03 2747.5,2700.3 2763.87,2716.67 2763.87,2892.93 2754.49,2902.32 S17.1 2754.49,3262.04 2747.5,3269.03 2747.5,3445.3 2763.87,3461.67 2763.87,3637.93 2754.49,3647.32 S13.1 2754.49,4050.11 2747.5,4057.09 2747.5,4273.4 2763.87,4289.78 2763.87,4426.45 2754.49,4435.83 S8.1 2754.49,4795.11 2747.5,4802.09 2747.5,5018.4 2763.87,5034.78 2763.87,5171.45 2754.49,5180.83 S3.1 2695,5356.5 T11.3
"LED Ca9": S4.4 S9.4 S14.4 S18.4 S23.4 S26.4 T14.3 | length 4150.6
  Bottom Layer w12: S26.4 3799.5,1783.98 3735.5,1847.98 3735.5,2044.27 3791.13,2099.91 3791.13,2308.63 S23.4 3799.5,2528.98 3735.5,2592.98 3735.5,2789.27 3791.13,2844.91 3791.13,3053.63 S18.4 3799.5,3273.98 3735.5,3337.98 3735.5,3534.27 3791.13,3589.91 3791.13,3798.63 S14.4 3799.5,4018.98 3735.5,4082.98 3735.5,4279.27 3791.13,4334.91 3791.13,4543.63 S9.4 3799.5,4763.98 3735.5,4827.98 3735.5,5024.27 3791.13,5079.91 3791.13,5288.63 S4.4 3799.5,5300.95 3835,5336.45 T14.3
"LED Ca10": S4.3 S9.3 S14.3 S18.3 S23.3 S26.3 T15.3 | length 4054.9
  Bottom Layer w12: T15.3 3670,5342.19 3699.49,5312.7 S4.3 3699.49,5195.07 3741,5153.55 3741,5060.89 3699.49,5019.38 S9.3 3699.49,4450.07 3741,4408.55 3741,4315.89 3699.49,4274.38 S14.3 3741,3765.5 3741,3570.89 3699.49,3529.38 S18.3 3741,3020.5 3741,2825.89 3699.49,2784.38 S23.3 3741,2275.5 3741,2080.89 3699.49,2039.38 S26.3
"LED Ca11": S4.1 S9.1 S14.1 S18.1 S23.1 S26.1 T12.3 | length 3957
  Bottom Layer w12: T12.3 3455,5341.5 S4.1 3499.49,5137.32 3508.87,5127.94 3508.87,4951.67 3492.5,4935.3 3492.5,4759.03 3499.49,4752.04 S9.1 3499.49,4435.83 3508.87,4426.45 3508.87,4289.78 3492.5,4273.4 3492.5,4057.09 3499.49,4050.11 S14.1 3499.49,3690.83 3508.87,3681.45 3508.87,3544.78 3492.5,3528.41 3492.5,3312.09 3499.49,3305.11 S18.1 3499.49,2945.83 3508.87,2936.45 3508.87,2799.78 3492.5,2783.41 3492.5,2567.09 3499.49,2560.11 S23.1 3499.49,2157.32 3508.87,2147.93 3508.87,1971.67 3492.5,1955.3 3492.5,1779.03 3499.49,1772.04 S26.1
"LED Ca12": S5.4 S10.4 S19.4 S27.4 T9.3 | length 3728.7
  Bottom Layer w12: S27.4@4544.5,1944 4544.5,2135.5 4453,2227 4453,3134.28 4510,3191.28 4510,3350.54 4508,3352.54 4544.5,3389.04 S19.4 4598.53,3488.53 4598.53,4134.5 4646.87,4182.84 4646.87,4385.5 4544.5,4487.87 S10.4 4544.5,4763.98 4480.5,4827.98 4480.5,5024.27 4536.13,5079.91 4536.13,5288.63 S5.4 4544.5,5300.95 4580,5336.45 T9.3
"LED Ca13": S5.3 S10.3 S19.3 S27.3 T6.3 | length 3625.3
  Bottom Layer w12: T6.3 4415,5342.19 4444.49,5312.7 S5.3 4444.49,5195.07 4486,5153.55 4486,5060.89 4444.49,5019.38 S10.3 4444.49,4450.07 4486,4408.55 4486,4284.78 4444.49,4243.27 S19.3 4444.49,3391.01 4482.49,3353.01 4486,3349.5 4486,3198.39 4431,3143.39 4431,2217.89 4444.49,2204.4 S27.3@4444.49,1944.01
"LED Ca14": S5.1 S10.1 S19.1 S27.1 T3.3 | length 3748.1
  Bottom Layer w12: T3.3 4205,5336.5 S5.1 4244.49,5180.83 4253.87,5171.45 4253.87,5034.78 4237.5,5018.4 4237.5,4802.09 4244.49,4795.11 S10.1 4143.13,4450.65 4143.13,3535.86 4280,3399 4280,3150 4390,3040 4390,2750 4408,2732 4408,2107.52 S27.1@4244.49,1944.01
LS0: R3.2 T13.1 | length 59.2
  Bottom Layer w12: 2162.6,5542.24 2163.8,5543.44 2163.8,5599.27 R3.2
LS1: R4.2 T10.1 | length 63.9
  Bottom Layer w12: 2362.6,5542.24 2364.04,5543.68 2364.04,5603.56 R4.2
LS2: R5.2 T7.1 | length 71
  Bottom Layer w12: T7.1 1137.6,5598.19 1145.47,5606.06 R5.2
LS3: R6.2 T4.1 | length 71.2
  Bottom Layer w12: 1327.6,5542.24 1327.6,5597.72 1335.94,5606.06 R6.2
LS4: R7.2 T1.1 | length 71
  Bottom Layer w12: 1527.6,5542.24 1527.6,5598.19 1535.47,5606.06 R7.2
LS5: R9.2 T2.1 | length 66
  Bottom Layer w12: T2.1 1907.6,5550.12 1915.47,5557.99 R9.2
LS6: R10.2 T5.1 | length 73.1
  Bottom Layer w12: T5.1 3042.6,5588.19 3055.47,5601.06 R10.2
LS7: R8.1 T8.1 | length 73.1
  Bottom Layer w12: T8.1 2882.6,5545.12 2895.47,5557.99 R8.1
LS8: R11.2 T11.1 | length 66
  Bottom Layer w12: T11.1 2657.6,5550.12 2665.47,5557.99 R11.2
LS9: R12.2 T14.1 | length 66
  Bottom Layer w12: T14.1 3797.6,5545.12 3805.47,5552.99 R12.2
LS10: R13.2 T15.1 | length 66
  Bottom Layer w12: 4167.6,5537.24 4167.6,5545.12 4175.47,5552.99 R13.2
LS11: R14.2 T12.1 | length 66
  Bottom Layer w12: 4377.6,5537.24 4377.6,5545.12 4385.47,5552.99 R14.2
LS12: R15.2 T9.1 | length 68.1
  Bottom Layer w12: T9.1 4542.6,5545.12 4555.47,5557.99 R15.2
LS13: R16.2 T6.1 | length 66
  Bottom Layer w12: 3417.6,5537.24 3417.6,5588.19 3425.47,5596.06 R16.2
LS14: R17.2 T3.1 | length 88.3
  Bottom Layer w12: 3632.6,5537.24 3632.6,5545.12 3638.41,5550.93 3646.28,5550.93 3670,5574.65 R17.2
NetD1_1: D1.1 S1.6 | length 147.7
  Bottom Layer w12: D1.1 1556.24,4855 1558.11,4856.87 1558.11,4995.62 S1.6
NetD2_1: D2.1 S2.6 | length 147.7
  Bottom Layer w12: D2.1 2301.24,4855 2303.11,4856.87 2303.11,4995.62 S2.6
NetD3_1: D3.1 S3.6 | length 142.7
  Bottom Layer w12: D3.1 3046.24,4860 3048.11,4861.87 3048.11,4995.62 S3.6
NetD4_1: D4.1 S4.6 | length 147.7
  Bottom Layer w12: D4.1 3791.24,4855 3793.11,4856.87 3793.11,4995.62 S4.6
NetD5_1: D5.1 S5.6 | length 145.3
  Bottom Layer w12: S5.6 4543.11,4997.39 4543.11,4856.61 D5.1
NetD6_1: D6.1 S6.6 | length 129.7
  Bottom Layer w12: D6.1 1559.72,4165.88 1561.5,4167.65 S6.6
NetD7_1: D7.1 S7.6 | length 148.7
  Bottom Layer w12: S7.6 2310.61,4249.89 2310.61,4111.87 2312.48,4110 D7.1
NetD8_1: D8.1 S8.6 | length 142.7
  Bottom Layer w12: D8.1 3046.24,4115 3048.11,4116.87 3048.11,4250.62 S8.6
NetD9_1: D9.1 S9.6 | length 153.5
  Bottom Layer w12: D9.1 D9.1@3788.87,4110 ; D9.1@3790.38,4111.87 3788.87,4110.36 D9.1@3788.87,4110 ; S9.6 3790.75,4248.26 3790.75,4111.87 D9.1@3788.87,4110
NetD10_1: D10.1 S10.6 | length 134.7
  Bottom Layer w12: D10.1 4540.61,4120.89 4540.61,4253.12 S10.6
NetD11_1: D11.1 S11.6 | length 134.7
  Bottom Layer w12: D11.1 1560.61,3375.89 1560.61,3508.12 S11.6
NetD12_1: D12.1 S12.6 | length 133.7
  Bottom Layer w12: S12.6 2310.61,3504.89 2310.61,3381.87 2312.48,3380 D12.1
NetD13_1: D13.1 S13.6 | length 138.7
  Bottom Layer w12: S13.6 3055.61,3504.89 3055.61,3376.87 3057.48,3375 D13.1
NetD14_1: D14.1 S14.6 | length 134.7
  Bottom Layer w12: D14.1 3795.61,3375.89 3795.61,3508.12 S14.6
NetD15_1: D15.1 S15.6 | length 144.7
  Bottom Layer w12: D15.1 1560.61,2620.89 1560.61,2763.12 S15.6
NetD16_1: D16.1 S16.6 | length 130.3
  Bottom Layer w12: S16.6 2308.11,2762.39 2308.11,2636.61 D16.1
NetD17_1: D17.1 S17.6 | length 127.5
  Bottom Layer w12: D17.1 3046.37,2640 3048.25,2641.87 3048.25,2760.76 S17.6
NetD18_1: D18.1 S18.6 | length 139.7
  Bottom Layer w12: D18.1 3795.61,2625.89 3795.61,2763.12 S18.6
NetD19_1: D19.1 S19.6 | length 139.3
  Bottom Layer w12: S19.6@4541.5,3093.01 4543.11,3091.39 4543.11,2956.61 D19.1
NetD20_1: D20.1 S20.6 | length 129.7
  Bottom Layer w12: D20.1 1560.61,1890.89 1560.61,2018.12 S20.6
NetD21_1: D21.1 S21.6 | length 139.7
  Bottom Layer w12: D21.1 2305.61,1880.89 2305.61,2018.12 S21.6
NetD22_1: D22.1 S22.6 | length 124.7
  Bottom Layer w12: D22.1 3050.61,1895.89 3050.61,2018.12 S22.6
NetD23_1: D23.1 S23.6 | length 148.5
  Bottom Layer w12: D23.1 D23.1@3788.87,1880 ; D23.1@3790.38,1881.87 3788.87,1880.36 D23.1@3788.87,1880 ; S23.6 3790.75,2013.26 3790.75,1881.87 D23.1@3788.87,1880
NetD24_1: D24.1 S24.6 | length 182
  Bottom Layer w12: S24.6 1561.5,1096.87 1563.37,1095 D24.1 D24.1@1564.11,1095.61
NetD25_1: D25.1 S25.6 | length 293.8
  Bottom Layer w12: S25.6 2767.84,1274.01 2906.85,1135 D25.1
NetD26_1: D26.1 S26.6 | length 129.7
  Bottom Layer w12: D26.1 3795.61,1145.89 3795.61,1273.12 S26.6
NetD27_1: D27.1 S27.6 | length 136.9
  Bottom Layer w12: D27.1 4540.47,1511.02 4540.47,1644.98 S27.6@4541.5,1646.01
NetR1_1: R1.1 T16.1 T17.3 | length 505.5
  Bottom Layer w12: R1.1 3400,5960 T17.3 3607.24,5775.47 3597.4,5765.63 T16.1
NetR2_2: R2.2 T16.2 T17.1 TP2.1 | length 591.8
  Bottom Layer w12: R2.2 3225,5815 3240,5830 3450.35,5830 3508.91,5771.44 3516.79,5771.44 T16.2@3522.6,5765.63 ; T17.1 3516.79,5922.6 3522.6,5916.79 3522.6,5771.44 T16.2@3522.6,5765.63 ; T16.2 T16.2@3522.6,5765.63
NetR3_1: R3.1 U1.15 | length 664
  Bottom Layer w12: U1.15 1660,5828 1722,5890 1968.91,5890 2165,5693.91 R3.1
NetR4_1: R4.1 U1.14 | length 912.8
  Bottom Layer w10: U1.14 1710,5828 1751,5869 1960.21,5869 2120,5709.21 2120,5640.86 2130.11,5630.75 2305.75,5630.75 2320,5645 2388.46,5645 2424.53,5608.94 R4.1
NetR5_1: R5.1 U1.13 | length 651.1
  Bottom Layer w12: R5.1 1204.53,5613.94 1212.31,5621.72 1216.24,5621.72 1314.53,5720 1687.5,5720 1760,5792.5 U1.13
NetR6_1: R6.1 U1.12 | length 510.7
  Bottom Layer w12: R6.1 1395,5613.94 1402.78,5621.72 1406.72,5621.72 1480,5695 1712.5,5695 1810,5792.5 U1.12
NetR7_1: R7.1 U1.11 | length 358.8
  Bottom Layer w12: R7.1 1677.5,5610 1860,5792.5 U1.11
NetR8_2: R8.2 U1.7 | length 1264
  Bottom Layer w12: U1.7 1910,5950 1920,5940 2050,5940 2265,5725 2838.46,5725 2954.53,5608.94 R8.2 R8.2@2951.31,5608.21
NetR9_1: R9.1 U1.10 | length 232
  Bottom Layer w12: U1.10 1910,5792.5 1938,5764.5 1938,5760.89 1974.53,5724.36 R9.1
NetR10_1: R10.1 U1.9 | length 1445.4
  Top Layer w12: v1(2050,5680) 3080,5680 v1(3190,5570)
  Bottom Layer w12: U1.9 1960,5770 v1(2050,5680) ; R10.1 3114.53,5601.06 3122.31,5593.28 3126.24,5593.28 3147,5572.53 3187.47,5572.53 v1(3190,5570)
NetR11_1: R11.1 U3.15 | length 1362.1
  Top Layer w12: v1(2800,5605) 2885,5520 3700,5520 v1(3865,5685)
  Bottom Layer w12: R11.1 v1(2800,5605) ; v1(3865,5685) 3865,5692.4 3891.71,5719.11 3891.71,5734.21 3920,5762.5 U3.15
NetR12_1: R12.1 U3.14 | length 223.9
  Bottom Layer w12: R12.1 3864.53,5603.94 3970,5709.41 U3.14
NetR13_1: R13.1 U3.13 | length 323.9
  Bottom Layer w12: U3.13 4020,5725 4085,5660 4178.46,5660 4234.53,5603.94 R13.1
NetR14_1: R14.1 U3.12 | length 461.9
  Bottom Layer w12: U3.12 4070,5762.5 4147.5,5685 4363.46,5685 4444.53,5603.94 R14.1
NetR15_1: R15.1 U3.11 | length 581.9
  Bottom Layer w12: U3.11 4120,5762.5 4175.5,5707 4511.46,5707 4614.53,5603.94 R15.1
NetR16_1: R16.1 U3.10 | length 835.8
  Bottom Layer w10: R16.1 3484.53,5603.94 3493.31,5612.72 3497.24,5612.72 3514.53,5630 3641.82,5630 3646.07,5634.25 3709.25,5634.25 3710,5635
  Bottom Layer w12: 3710,5635 3710,5680.63 3853.37,5824 4144,5824 4170,5798 U3.10
NetR17_1: R17.1 U3.9 | length 702.1
  Bottom Layer w12: R17.1 3673.94,5664.53 3681.72,5672.31 3681.72,5726.72 3810,5855 4163,5855 4220,5798 U3.9
NetR18_1: R18.1 U2.15 | length 265.7
  Bottom Layer w12: R18.1 4200,2733.65 4260,2673.65 4260,2607.5 4302.5,2565 U2.15
NetR19_1: R19.1 U2.14 | length 168
  Bottom Layer w12: R19.1 4203.94,2620.47 4298.5,2525.91 4298.5,2519 4302.5,2515 U2.14
NetR20_1: R20.1 U2.13 | length 129.6
  Bottom Layer w12: R20.1 4292.03,2475.47 4302.5,2465 U2.13
NetR21_1: R21.1 U2.12 | length 167.7
  Bottom Layer w12: R21.1 4230.72,2330.47 4264.61,2364.36 4264.61,2377.11 4302.5,2415 U2.12
NetR22_1: R22.1 U2.11 | length 254.1
  Bottom Layer w12: R22.1 4198.94,2175.47 4260,2236.54 4260,2322.5 4302.5,2365 U2.11
NetR23_1: R23.1 U2.10 | length 382.4
  Bottom Layer w12: R23.1 4193.94,2035.47 4364,2205.54 4364,2289 4338,2315 U2.10
NetT1_2: T1.2 T2.2 T3.2 T4.2 T5.2 T6.2 T7.2 T8.2 T9.2 T10.2 T11.2 T12.2 T13.2 T14.2 T15.2 T16.3 | length 5188.1
  Bottom Layer w12: T7.2 1212.4,5534.37 1218.21,5528.56 1226.09,5528.56 1259.65,5495 1449.65,5495 ; T10.2 1402.4,5534.37 1408.21,5528.56 1416.09,5528.56 1449.65,5495 ; T13.2 1602.4,5534.37 1608.21,5528.56 1616.09,5528.56 1649.65,5495 ; T2.2 1982.4,5534.37 1988.21,5528.56 1996.09,5528.56 2029.65,5495 ; T1.2 2237.4,5534.37 2243.21,5528.56 2251.09,5528.56 2284.65,5495 ; T4.2 2437.4,5534.37 2443.21,5528.56 2451.09,5528.56 2484.65,5495 ; T11.2 2732.4,5507.6 2745,5495 ; T8.2 2957.4,5502.6 2965,5495 ; T5.2 3117.4,5497.4 3115,5495 ; T12.2 3492.4,5529.37 3469.62,5506.59 3469.62,5504.62 3460,5495 ; T16.3 3560,5720 ; T15.2 3707.4,5529.37 3701.59,5523.56 3693.72,5523.56 3665.16,5495 ; T14.2 3872.4,5529.37 3858.11,5515.07 3858.11,5503.11 3850,5495 ; 4200,5495 3850,5495 ; 4200.03,5494.97 4208,5494.97 ; T3.2 4242.4,5529.37 4208,5494.97 ; T6.2 4452.4,5529.37 4433.49,5510.45 4433.49,5503.49 4424.97,5494.97 ; T9.2 4617.4,5529.37 4598.49,5510.45 4598.49,5503.49 4589.97,5494.97 4424.97,5494.97 ; 1449.65,5495 1649.65,5495 ; 1649.65,5495 2029.65,5495 ; 2029.65,5495 2284.65,5495 ; 2284.65,5495 2484.65,5495 ; 2484.65,5495 2745,5495 ; 2745,5495 2965,5495 ; 2965,5495 3115,5495 ; 3115,5495 3240,5495 3280,5535 3280,5770 3298.61,5788.61 3369.36,5788.61 3375,5782.97 3375,5775 3430,5720 3560,5720 ; 3460,5495 3665.16,5495 ; 3460,5495 3387.03,5495 3380,5502.03 3380,5630 3397.5,5647.5 3487.5,5647.5 3560,5720 ; 3665.16,5495 3850,5495 ; 4208,5494.97 4424.97,5494.97
SWH0: P3.1 S1.5 S2.5 S3.5 S4.5 S5.5 U4.9 | length 7314.8
  Top Layer w12: 1430,835 1057,1208 1057,4645.5 S1.5 S2.5 S3.5 S4.5 S5.5
SWH1: P3.2 S6.5 S7.5 S8.5 S9.5 S10.5 U4.11 | length 6630.1
  Top Layer w12: 1530,835 1465,900 1401.66,900 1079,1222.66 1079,3922.5 S6.5 S7.5 S8.5 S9.5 S10.5
SWH2: P3.3 S11.5 S12.5 S13.5 S14.5 U4.13 | length 5203.7
  Top Layer w12: 1630,835 1535,930 1402.77,930 1101,1231.77 1101,3199.5 S11.5 S12.5 S13.5 S14.5
SWH3: P3.4 S15.5 S16.5 S17.5 S18.5 S19.5 U4.15 | length 5577.3
  Top Layer w12: 1730,835 1683,882 1610,955 1408.89,955 1123,1240.89 1123,2476.5 S15.5 S16.5 S17.5 S18.5 4192,2672 4298.5,2778.5 S19.5
SWH4: P3.5 S20.5 S21.5 S22.5 S23.5 U4.17 | length 3840.8
  Top Layer w12: 1830,835 1680,985 1410,985 1145,1250 1145,1753.5 S20.5 S21.5 S22.5 S23.5
SWH5: P3.6 S24.5 S25.5 S26.5 S27.5 U4.19 | length 4047.8
  Top Layer w12: S24.5 S25.5 S26.5 4197,1182 4298.5,1283.5 S27.5@4298.5,1554
  Bottom Layer w12: S24.5 1540.5,960 1805,960 1873,892 1930,835
SWL0: D1.2 D6.2 D11.2 D15.2 D20.2 D24.2 P3.7 R24.1 U4.3 | length 4357.8
  Bottom Layer w12: D1.2 1653.15,4855 1666.87,4841.28 1666.87,4263.2 1650.28,4246.61 D6.2 1650.28,3827.71 1666.87,3811.12 1666.87,3515.7 1650.28,3499.11 D11.2 1650.28,3077.71 1666.87,3061.12 1666.87,2765.7 1650.28,2749.11 D15.2 1650.28,2350.24 1688.87,2311.64 1688.87,2043.76 1650.28,2005.16 D20.2 1658.15,1890 1660.02,1888.13 1660.02,1880.25 1690,1850.28 1690,1285.8 1655.28,1251.07 D24.2 1770,1095 2030,835
SWL1: D2.2 D7.2 D12.2 D16.2 D21.2 P3.8 R25.1 U4.4 | length 4174.3
  Bottom Layer w12: 2130,835 2130,1622.6 2387.4,1880 D21.2 2395.28,2006.61 2411.87,2023.2 2411.87,2631.28 2408.15,2635 D16.2 2400.28,2835.47 2411.87,2847.07 2411.87,3378.13 2410,3380 D12.2 2405.28,3585.47 2411.87,3592.07 2411.87,4108.13 2410,4110 2411.87,4111.87 2411.87,4471.7 2390.28,4493.3 D2.2
SWL2: D3.2 D8.2 D13.2 D17.2 D22.2 D25.2 P3.9 R26.1 U4.5 | length 4755.7
  Bottom Layer w12: 2230,835 2485,1090 2915.97,1090 2960.97,1135 D25.2 3005.28,1767.87 3132.4,1895 D22.2 3148.15,1895 3156.87,1903.72 3156.87,2359.44 3135.55,2380.75 D17.2 3143.43,2640 3156.87,2653.44 3156.87,3106.8 3150.28,3113.39 D13.2 3150.28,3504.11 3156.87,3510.7 3156.87,4101.28 3143.15,4115 D8.2 3135.28,4239.11 3156.87,4260.7 3156.87,4548.62 3135.28,4570.21 D3.2
SWL3: D4.2 D9.2 D14.2 D18.2 D23.2 D26.2 P3.10 R27.1 U4.6 | length 5687
  Top Layer w12: 2330,835 2565,1070 3942.97,1070 3970.58,1097.61 3970.58,1125.58 v1(3975,1130)
  Bottom Layer w12: D4.2 3880.28,4605.89 3901.87,4584.3 3901.87,4128.44 3883.43,4110 D9.2 3875.55,3863.25 3901.87,3836.94 3901.87,3383.72 3893.15,3375 D14.2 3885.28,3118.39 3901.87,3101.8 3901.87,2847.07 3885.28,2830.47 D18.2 3885.28,2370.89 3901.87,2354.3 3901.87,1898.44 3883.43,1880 D23.2 3875.55,1630.75 3901.87,1604.44 3901.87,1153.72 D26.2@3893.15,1145 ; D26.2 D26.2@3893.15,1145 ; v1(3975,1130) 3964.72,1130 3949.72,1145 D26.2@3893.15,1145
SWL4: D5.2 D10.2 D19.2 D27.2 P3.11 R28.1 U4.7 | length 6067.1
  Bottom Layer w12: 2430,835 2650,1055 4440,1055 4630,1245 D27.2 4637.87,1510 4675,1547.13 4675,2915.28 4645.02,2945.25 4645.02,2953.13 4643.15,2955 D19.2 4635.28,3083.61 4646.87,3095.2 4646.87,4111.28 D10.2@4638.15,4120 ; D10.2 D10.2@4638.15,4120 ; D5.2 4635.28,4600.89 4668.87,4567.3 4668.87,4150.72 D10.2@4638.15,4120
pads on no net: S1. S2. S3. S4. S5. S6. S7. S8. S9. S10. S11. S12. S13. S14. S15. S16. S17. S18. S19. S19.10 S20. S21. S22. S23. S24. S25. S25.10 S26. S27. S27.10 U2.7 U2.9 U3.7 U4.2 U4.8 U4.10 U4.12 U4.14 U4.16 U4.18 U4.20 U4.22 U4.24 U4.26 U4.28 U4.30 U4.32 U4.34 U4.38 U4.NC
copper on no net: | length 22238
  Top Layer w12: 2380,6025 2380,6015 2591,5804 3129.78,5804 3168.78,5843 4658.97,5843 4705,5796.97 4705,2695 v1(4610,2600) ; 2480,6025 2655,6200 4160,6200 4378,5982 4683,5982 4730,5935 4730,2635 v1(4610,2515)
  Bottom Layer w12: 1610,6019.75 1610,6037.5 1741.5,6169 2741,6169 2880,6030 2880,6025 2989.56,6134.56 3742.94,6134.56 3870,6007.5 3870,5989.75 ; 1660,6019.75 1660,6037.5 1769.5,6147 2658,6147 2780,6025 2789,6016 2789,5981 2815,5955 3091.68,5955 3125.53,5988.85 3125.53,6040.53 3197.56,6112.56 3642.44,6112.56 3809,5946 3886.63,5946 3889.63,5949 3897,5949 3920,5972 3920,5989.75 ; 1710,6019.75 1710,6037.5 1797.5,6125 2580,6125 2680,6025 2775,5930 3097.8,5930 3152.63,5984.84 3152.63,6032.63 3210.56,6090.56 3624.44,6090.56 3791,5924 3895.74,5924 3898.74,5927 3925,5927 3970,5972 3970,5989.75 ; 1760,6019.75 1760,6037.5 1822.5,6100 2505,6100 2580,6025 2580,6015 2700,5895 3240,5895 3290,5945 3290,6051.53 3307.03,6068.56 3606.44,6068.56 3773,5902 3904.85,5902 3907.85,5905 4053,5905 4120,5972 4120,5989.75 ; 4529.75,2515 v1(4610,2515) ; 4529.75,2565 4575,2565 v1(4610,2600)

## Polygon pours and split planes (outlines as drawn)
GND on Bottom Layer "GND_L02_P000" (solid, pour order 0): 1005,6255 4810,6255 4810,775 999.79,775

## Text inside footprints (layer, text, board x,y; h text height)
U1: Mechanical 13 "*" at 1637,5989.5 h50 r90; Bottom Overlay "*" at 1595,6042.25 h50 r90
U2: Mechanical 13 "*" at 4499.5,2588 h50; Bottom Overlay "*" at 4552.25,2630 h50
U3: Mechanical 13 "*" at 3897,5959.5 h50 r90; Bottom Overlay "*" at 3855,6012.25 h50 r90